# Altium PCB BAD.PcbDoc (part 2 of 2)
Units mil, origin at the board's own origin, x right, y up, seen from the top; angles counter-clockwise.
Board outline 1811.02 x 1811.02 mil, 4 copper layers (Top Layer, Int1 (GND), Int2, Bottom Layer), stack 53.912 mil thick; 65 components, 61 nets, 262 pads, 174 vias.
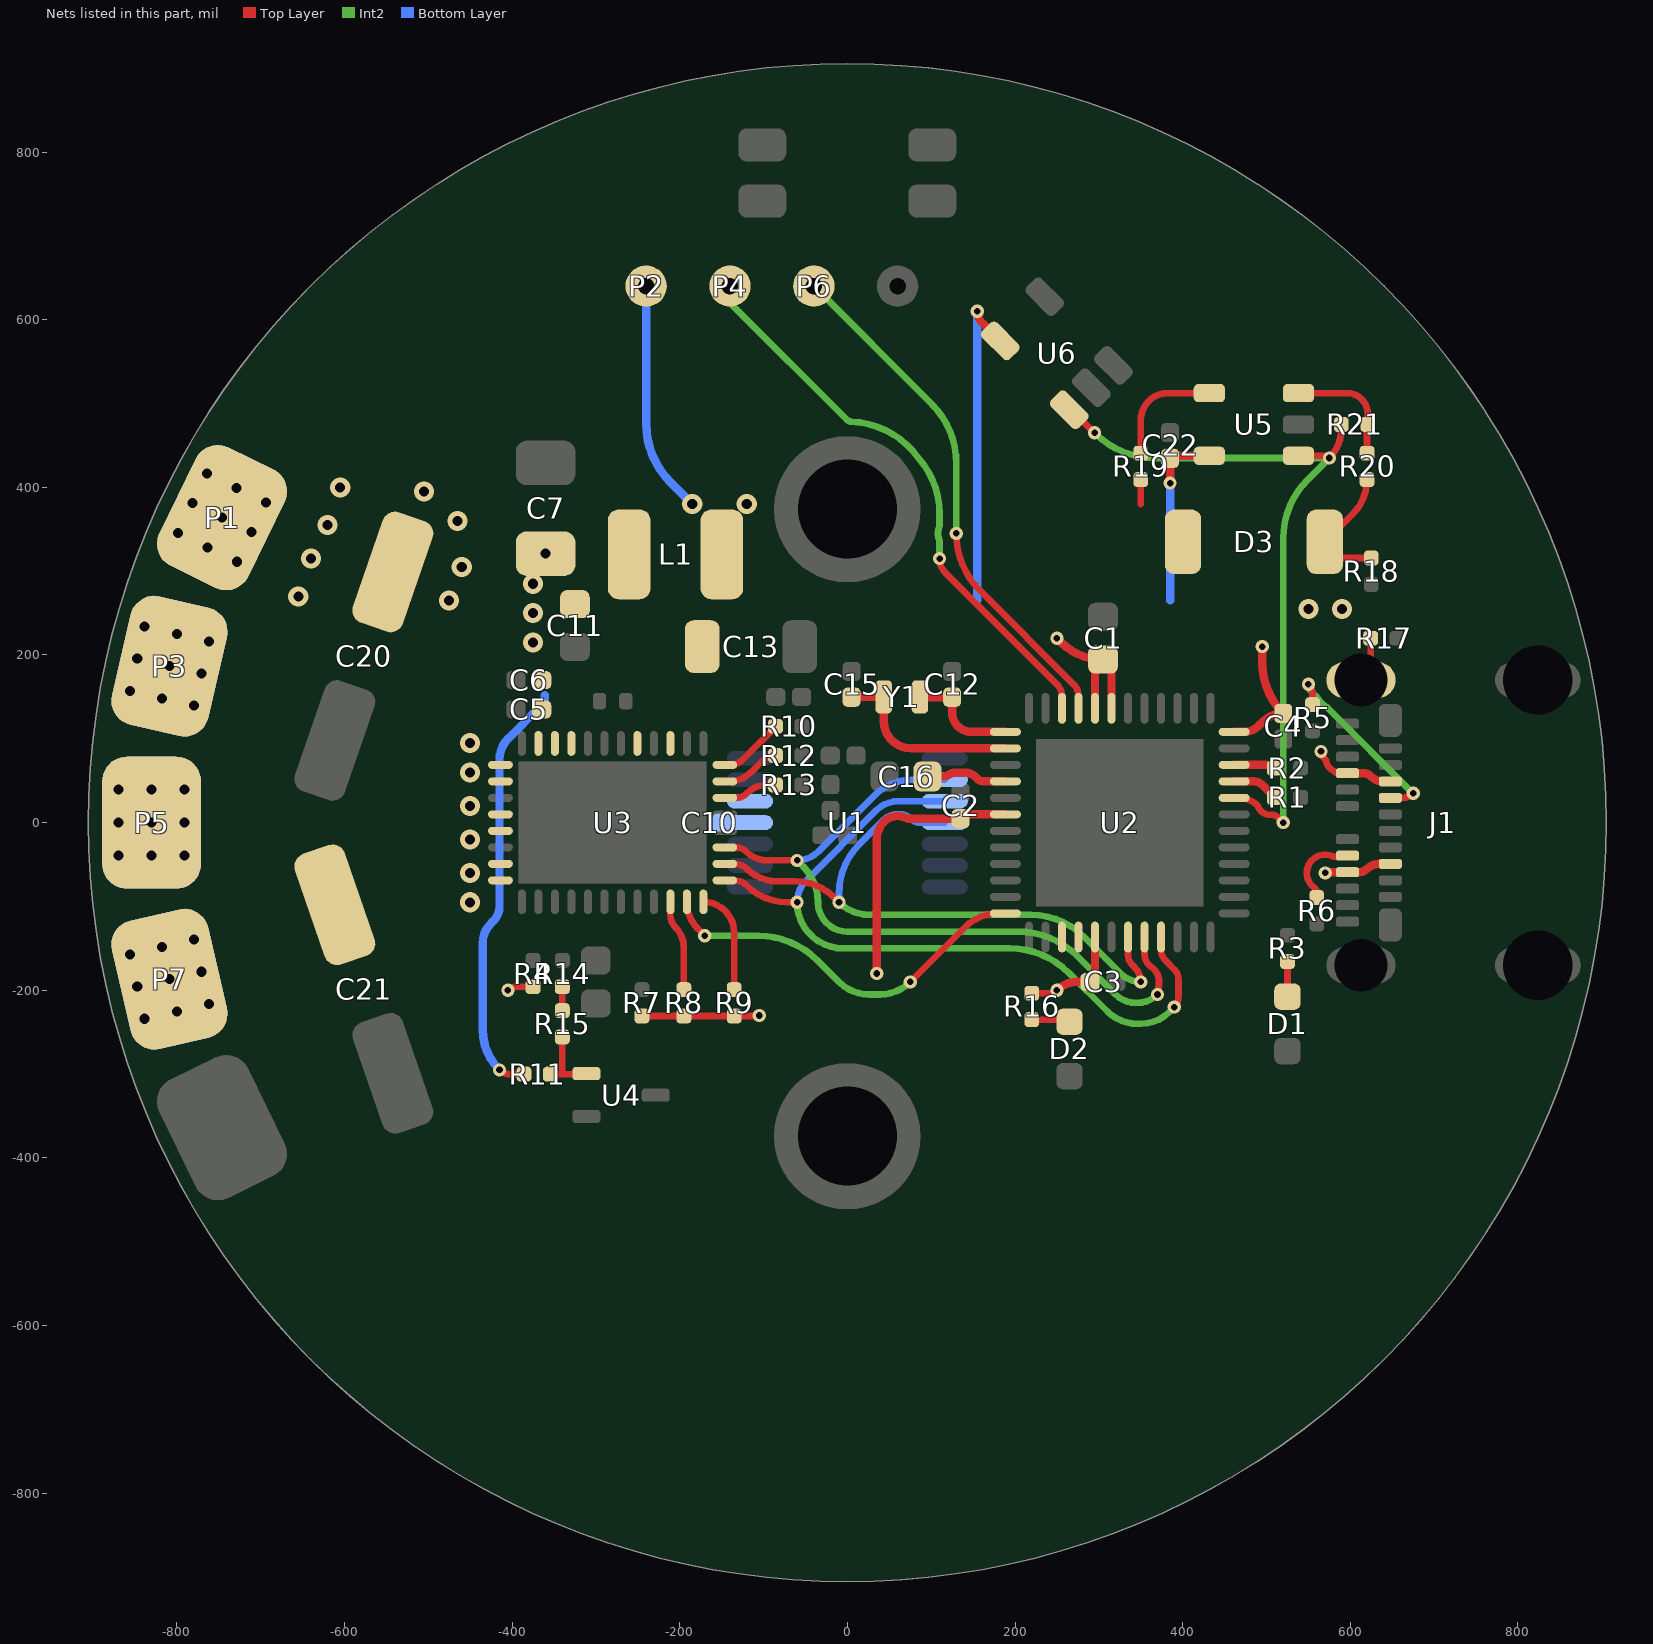
[diagram p4: the nets of this part, all layers, seen from the top]

## Via types
v1: diameter 15.75, hole 7.87, Top Layer to Bottom Layer, tented both sides, 77 vias
v2: diameter 12, hole 12, Top Layer to Bottom Layer, 45 vias
v3: diameter 24, hole 12, Top Layer to Bottom Layer, tented both sides, 36 vias
v4: diameter 7.87, hole 7.87, Top Layer to Bottom Layer, tented both sides, 16 vias

## Nets (pads, with @x,y where several pads share a name; then routed paths per layer and width w, separated by ;. In a path a pad name is that pad's centre, name@x,y a point inside that pad or via, vN(x,y) a via of type N, cw(c..) or ccw(c..) an arc to the next point about the centre after c; other vN are vias at no path point) (continued)
IN_VL: R8.2 U3.30 | length 109.1
  Top Layer w8: U3.30@-211.1,-94.49 -211.1,-110.27 ccw(c-190.27,-110.27) -205,-125 cw(c-229.14,-149.14) -195,-149.14 R8.2@-195,-199.25
IN_WH: U2.12 U3.31 | length 463.9
  Top Layer w8: U3.31@-191.42,-94.49 ccw(c-145.32,-94.49) -177.92,-127.08 v1(-170,-135) ; v1(75,-190) 140,-125 cw(c180.4,-165.4) 180.4,-108.27 U2.12@188.56,-108.27
  Int2 w8: v1(-170,-135) -106.42,-135 cw(c-106.42,-235) -35.71,-164.29 -10,-190 ccw(c26.21,-153.79) 26.21,-205 38.79,-205 ccw(c38.79,-153.79) v1(75,-190)
IN_WL: R9.2 U3.32 | length 125.7
  Top Layer w8: U3.32@-171.73,-94.49 cw(c-171.73,-131.22) -135,-131.22 R9.2@-135,-199.25
MISO: U1.3 U2.21 U3.33 | length 939.8
  Top Layer w8: U3.33@-146.14,-68.9 -134.73,-68.9 cw(c-134.73,-89.73) -120,-75 ccw(c-71.72,-26.72) -71.72,-95 v1(-60,-95) ; U2.21@374.21,-136.44 374.21,-151.03 ccw(c393.97,-151.03) 380,-165 390,-175 cw(c377.93,-187.07) 395,-187.07 395,-207.93 cw(c377.93,-207.93) v1(390,-220)
  Int2 w8: v1@-60,-99.64 v1(-60,-95) ccw(c-5,-95) -5,-150 193.58,-150 cw(c193.58,-250) 264.29,-179.29 310,-225 ccw(c346.21,-188.79) 346.21,-240 350,-240 ccw(c350,-191.72) 384.14,-225.86 v1(390,-220)
  Bottom Layer w8: v1(-60,-95) cw(c-23.79,-95) -49.4,-69.4 35,15 cw(c60.57,-10.57) 60.57,25.59 U1.3@116.14,25.59
MOSI: U1.4 U2.19 U3.34 | length 793.1
  Top Layer w8: U3.34@-146.14,-49.21 -133.97,-49.21 cw(c-133.97,-68.97) -120,-55 ccw(c-83.79,-18.79) -83.79,-70 -61.89,-70 cw(c-61.89,-134.91) -15.99,-89.01 v1(-10,-95) ; U2.19@334.84,-136.44 334.84,-157.55 ccw(c352.45,-157.55) 339.99,-169.99 342.93,-172.93 cw(c325.86,-190) v1(350,-190)
  Int2 w8: v1(-10,-95) ccw(c26.21,-58.79) 26.21,-110 218.73,-110 cw(c218.79,-200.14) 282.58,-136.46 326.09,-179.97 ccw(c350.17,-156.1) v1(350,-190)
  Bottom Layer w8: v1(-10,-95) -10,-84.79 cw(c73.99,-84.79) 14.6,-25.4 42.93,2.93 cw(c60,-14.14) 60,10 62.93,10 cw(c62.93,-7.07) 75,5 ccw(c87.07,17.07) 87.07,0 U1.4@116.14,0
NetC12_2: C12.2 U2.1 Y1.2 | length 133.6
  Top Layer w10: Y1.2@86.65,150 86.65,149.65 C12.2@125,149.65 125,131.59 ccw(c148.32,131.59) 148.32,108.27 U2.1@188.56,108.27
NetC15_2: C15.2 U2.2 Y1.1 | length 230.8
  Top Layer w10: C15.2@5,150 Y1.1@43.35,150 43.35,121.56 ccw(c76.33,121.56) 76.33,88.58 U2.2@188.56,88.58
NetC16_2: C16.2 U2.4 | length 97
  Top Layer w10: C16.2@95.59,55 114.23,55 ccw(c114.18,65) 119.66,56.63 cw(c129.69,41.46) 129.69,59.65 140.32,59.65 cw(c140.32,41.46) 154.37,53 ccw(c162.05,59.4) 160,49.62 ccw(c163.97,68.97) 163.97,49.21 U2.4@188.56,49.21
NetD1_2: D1.2 R3.2 | length 41.8
  Top Layer w8: D1.2@525,-207.52 R3.2@525,-165.75
NetD2_2: D2.2 R16.1 | length 45.7
  Top Layer w8: R16.1@220,-235 258.92,-235 cw(c258.92,-243.6) D2.2@265,-237.52
NetJ1_2: J1.2 R17.2 | length 53
  Top Layer w8: J1.2@612.72,170.08 ccw(c584.87,197.93) 624.25,197.93 R17.2@624.25,220
NetJ1_A5: J1.A5 R6.1 | length 96.9
  Top Layer w8: R6.1@560,-89.25 560,-83.8 ccw(c552,-83.84) 556.84,-77.47 cw(c570,-60) 578.85,-40 ccw(c582.04,-32.66) 583.4,-40.54 cw(c596.57,-114.08) 585.01,-40.27 ccw(c583.71,-32.38) 586.8,-39.76 586.8,-37.46 J1.A5@596.57,-39.37
NetJ1_B5: J1.B5 R5.1 | length 235.9
  Top Layer w8: v1(550,165) cw(c537.93,152.93) 555,152.93 R5.1@555,140.75 ; J1.B5@647.76,29.53 661.79,29.53 ccw(c661.79,48.21) 665.57,29.91 ccw(c663.92,37.74) 666.85,30.3 cw(c675,10) 668.87,31 ccw(c666.58,38.66) 670.12,31.49 ccw(c661.79,48.21) v1(675,35)
  Int2 w8: v1(550,165) 550,163.31 ccw(c558,163.31) 552.34,157.66 559.37,150.63 cw(c553.73,144.96) 560.46,149.28 ccw(c593.03,170.08) 572.17,137.55 cw(c567.91,130.77) 573.55,136.45 v1(675,35)
NetR10_1: R10.1 U3.40 | length 79
  Top Layer w8: U3.40@-146.14,68.9 -139.73,68.9 ccw(c-139.73,89.73) -125,75 R10.1@-86.28,113.72
  Top Layer w10: R10.1@-86.28,113.72 ccw(c-87.55,115) R10.1@-85.75,115
NetR11_1: R11.1 R15.2 U4.1 | length 87.3
  Top Layer w8: R11.1@-354.25,-300 -340,-300 ; R15.2@-340,-255.75 -340,-300 ; U4.1@-311.34,-299.41 cw(c-312.76,-297.99) -312.76,-300 -340,-300
NetR12_1: R12.1 U3.39 | length 70.6
  Top Layer w8: U3.39@-146.14,49.21 -141.04,49.21 ccw(c-141.04,86.04) -115,60 -101.54,73.46 cw(c-85.75,57.66) R12.1@-85.75,80
NetR13_1: R13.1 U3.38 | length 64.5
  Top Layer w8: U3.38@-146.14,29.53 -133.21,29.53 ccw(c-133.21,48.21) -120,35 cw(c-95.86,10.86) -95.86,45 R13.1@-85.75,45
NetR14_2: R14.2 R15.1 | length 28.5
  Top Layer w8: R15.1@-340,-224.25 R14.2@-340,-195.75
NetR19_1: R19.1 U5.4 | length 139.6
  Top Layer w8: R19.1@350,440.75 350,480 cw(c382.4,480) 382.4,512.4 U5.4@431.85,512.4
NetR20_1: R20.1 R21.1 U5.3 | length 143.9
  Top Layer w8: U5.3@538.15,512.4 596.18,512.4 cw(c596.18,487.84) 620.75,487.84 R21.1@620.75,475 ccw(c622.55,473.19) 620,473.19 R20.1@620,440.75
PHASE_U: P3.1 U3.13 U3.14
  other v2: -779.22,139.49 -817.58,148.35 -855.94,157.2 -770.37,177.85 -808.73,186.71 -847.09,195.57 -761.51,216.21 -799.87,225.07 -838.23,233.93
  other v3: -450,60 -450,95
PHASE_V: P5.1 U3.16 U3.17
  other v2: -869.37,-39.37 -830,-39.37 -790.63,-39.37 -869.37,0 -830,0 -790.63,0 -869.37,39.37 -830,39.37 -790.63,39.37
  other v3: -450,-20 -450,20
PHASE_W: P7.1 U3.19 U3.20
  other v2: -838.23,-233.93 -799.87,-225.07 -761.51,-216.21 -847.09,-195.57 -808.73,-186.71 -770.37,-177.85 -855.94,-157.2 -817.58,-148.35 -779.22,-139.49
  other v3: -450,-95 -450,-60
RX: U2.16
SCK: U1.2 U2.20 U3.35 | length 891.6
  Top Layer w8: U3.35@-146.14,-29.53 -133.21,-29.53 cw(c-133.21,-48.21) -120,-35 ccw(c-95.86,-10.86) -95.86,-45 v1(-60,-45) ; U2.20@354.53,-136.44 354.53,-156.79 ccw(c373.21,-156.79) 360,-170 360.62,-170.62 ccw(c366.24,-164.92) 361.85,-171.61 cw(c350,-190) 368.2,-177.87 cw(c362.28,-183.25) 369.77,-180.43 370.47,-182.29 cw(c350,-190) 371.87,-190 371.87,-191.39 cw(c363.87,-191.35) 371.73,-192.85 371.36,-194.8 ccw(c379.22,-196.29) 371.22,-196.29 371.22,-200.79 cw(c363.22,-200.75) v1(370,-205)
  Int2 w8: v1(-60,-45) -52.68,-52.32 cw(c-95.36,-95) -35,-95 ccw(c0,-95) 0,-130 203.58,-130 cw(c203.58,-230) 274.29,-159.29 320,-205 ccw(c344.14,-180.86) 344.14,-215 345.86,-215 ccw(c345.86,-180.86) v1(370,-205)
  Bottom Layer w8: v1(-60,-45) ccw(c-60,-8.79) -34.42,-34.42 33.54,33.54 cw(c76.14,-9.07) 76.14,51.18 U1.2@116.14,51.18
SW_BK: L1.2 U3.5
SWCLK: P6.1 U2.45 | length 625.1
  Top Layer w8: v1(130,345) ccw(c226.57,345) 158.28,276.72 270,165 cw(c256.03,151.03) 275.79,151.03 U2.45@275.79,136.44
  Int2 w8: P6.1@-40,640 100.71,499.29 cw(c30,428.58) 130,428.58 v1(130,345)
SWDIO: P4.1 U2.46 | length 680.7
  Top Layer w8: v1(110,315) ccw(c134.14,315) 117.07,297.93 250,165 cw(c235.27,150.27) 256.1,150.27 U2.46@256.1,136.44
  Int2 w8: P4.1@-140,640 -140,623.31 ccw(c-132,623.31) -137.66,617.66 -0.71,480.71 ccw(c4.91,486.4) 4.52,478.41 cw(c0,374.02) 85.26,434.42 cw(c10,368.58) 110,368.58 110,355.37 cw(c102,355.41) 109.51,352.66 ccw(c130,345) 109.51,337.35 cw(c102,334.59) 110,334.63 v1(110,315)
TX: U2.15
USB_IN: R21.2 U2.32 U5.1 U6.1 | length 933.8
  Top Layer w8: U6.1@264.62,492.49 cw(c264.62,485.5) 269.55,490.45 v1(295,465) ; U2.32@461.44,29.53 467,29.53 cw(c467,-3) 487.53,22.23 cw(c482.47,16.03) 489.82,19.19 ccw(c504.82,25.57) 504.82,9.27 507.42,9.27 cw(c507.42,1.27) 513.07,6.93 v1(520,0) ; U5.1@538.15,437.6 568.73,437.6 cw(c568.73,428.73) v1(575,435) ccw(c540.59,469.41) 589.25,469.41 R21.2@589.25,475
  Int2 w8: v1(295,465) 295.71,464.29 ccw(c366.42,535) 366.42,435 v1(575,435) 549.29,409.29 ccw(c620,338.58) 520,338.58 v1(520,0)
USB_N: R1.1 U2.33 | length 55.5
  Top Layer w10: U2.33@461.44,49.21 484.83,49.21 cw(c484.83,34.83) 495,45 R1.1@508.72,31.28 ; R1.1@508.73,31.27 cw(c507.45,30) R1.1@509.25,30
USB_P: R2.1 U2.34 | length 48.9
  Top Layer w10: U2.34@461.44,68.9 499.84,68.9 cw(c499.84,55.59) R2.1@509.25,65
VDD: C1.2 C2.2 C3.2 C4.2 C10.2 C13.1 C22.2 L1.1 P2.1 R4.1 R7.1 R8.1 R9.1 R16.2 U1.11 U1.12 U2.6 U2.17 U2.36 U2.43 U2.44 U3.3 U5.5 U6.5 | length 1858.1
  Top Layer w8: v1(-405,-200) cw(c-394.73,-210.27) -394.73,-195.75 R4.1@-375,-195.75 ; R7.1@-245,-230.75 R8.1@-195,-230.75 R9.1@-135,-230.75 -106.81,-230.75 ccw(c-106.81,-228.19) v1(-105,-230) ; R16.2@220,-203.5 241.54,-203.5 ccw(c241.54,-191.54) v1(250,-200)
  Top Layer w10: v1(35,-180) 35,-20 cw(c64.81,-20) 43.73,1.08 43.83,1.17 cw(c60,-15) 60,7.87 cw(c60,-15) 69.92,5.61 ccw(c74.21,14.65) 74.16,4.65 C2.2@135,4.65 cw(c140.2,4.65) 140.2,9.84 U2.6@188.56,9.84 ; v1(155,610) ccw(c174.06,610) 160.58,596.52 U6.5@182.49,574.62 ; v1(250,-200) cw(c274.14,-224.14) 274.14,-190 C3.2@289.65,-190 ccw(c275.58,-175.93) 295.47,-175.93 U2.17@295.47,-136.44 ; v1(250,220) 254.79,215.21 ccw(c305,265.41) C1.2@305,194.41 ; U2.44@295.47,136.44 295.47,184.88 C1.2@305,194.41 ; U2.43@315.16,136.44 315.16,184.25 C1.2@305,194.41 ; v1(385,405) C22.2@385,434.65 cw(c392.13,427.52) 392.13,437.6 U5.5@431.85,437.6 ; U2.36@461.44,108.27 473.75,108.27 ccw(c473.75,131.25) 490,115 495,120 cw(c520,95) C4.2@520,130.35 cw(c580.36,190.71) 495,190.71 v1(495,210)
  Bottom Layer w10: P2.1@-240,640 -240,476.42 ccw(c-140,476.42) -210.71,405.71 v3(-185,380) ; 155,265 v1(155,610) ; 385,265 v1(385,405)
  other v3: -120,380
VS: C5.2 C6.2 C7.2 C11.2 C20.1 C21.1 D3.1 P1.1 R11.2 R19.2 U3.9 U3.10 U3.11 | length 538.1
  Top Layer w8: v1(-415,-295) ccw(c-402.93,-282.93) -402.93,-300 R11.2@-385.75,-300 ; 350,380 R19.2@350,409.25
  Bottom Layer w10: v1(-415,-295) cw(c-366.72,-246.72) -435,-246.72 -435,-144.14 cw(c-400.86,-144.14) -425,-120 -422.07,-117.07 ccw(c-439.14,-100) -415,-100 -415,75 cw(c-378.79,75) -404.42,100.58 -366.46,138.54 ccw(c-380.06,152.13) -360.83,152.13
  other v2: -727.87,311.2 -763.26,328.46 -798.64,345.72 -710.61,346.59 -746,363.85 -781.38,381.11 -693.35,381.97 -728.74,399.23 -764.13,416.49
  other v3: -375,215 -375,250 -475,265 -655,270 -375,285 -460,305 -640,315 -360,320.84 -620,355 -465,360 -505,395 -605,400
VUSB: D3.2 J1.A4 J1.A9 J1.B4 J1.B9 R18.2 R20.2 | length 532.4
  Top Layer w8: v1(565,85) 565,83.98 ccw(c573,83.98) 567.34,78.32 569.13,76.53 cw(c563.45,70.9) 571.26,72.64 ccw(c585.75,75.79) 577.57,63.42 cw(c573.2,56.72) 577.82,63.25 581.68,60.52 ccw(c586.3,67.05) 586.26,59.05 J1.A9@596.57,59.06 ; R20.2@620,409.25 cw(c562.31,409.25) 603.1,368.46 D3.2@569.65,335 569.65,315.75 R18.2@625,315.75
  Top Layer w10: v1(570,-60) cw(c572.28,-62.28) 572.28,-59.06 610.21,-59.06 ccw(c610.21,-45.21) 620,-55 cw(c633.97,-68.97) 633.97,-49.21 J1.B9@647.76,-49.21 ; J1.A9@596.57,59.06 615.21,59.05 ; J1.B4@647.76,49.21 J1.B4@638.97,49.21 ; 615.21,59.05 cw(c615.21,45.21) 625,55 ; 615.21,59.05 cw(c615.21,45.21) 625,55 ; 615.21,59.05 cw(c615.21,45.21) 625,55 ; 615.21,59.05 cw(c615.21,45.21) 625,55 ; 615.21,59.05 cw(c615.21,45.21) 625,55 ; 615.21,59.05 cw(c615.21,45.21) 625,55 ; 615.21,59.05 cw(c615.21,45.21) 625,55 ; 615.21,59.05 cw(c615.21,45.21) 625,55 ; 625,55 ccw(c638.97,68.97) J1.B4@638.97,49.21 ; 625,55 ccw(c638.97,68.97) J1.B4@638.97,49.21 ; 625,55 ccw(c638.97,68.97) J1.B4@638.97,49.21 ; 625,55 ccw(c638.97,68.97) J1.B4@638.97,49.21 ; 625,55 ccw(c638.97,68.97) J1.B4@638.97,49.21 ; 625,55 ccw(c638.97,68.97) J1.B4@638.97,49.21 ; 625,55 ccw(c638.97,68.97) J1.B4@638.97,49.21 ; 625,55 ccw(c638.97,68.97) J1.B4@638.97,49.21
  other v3: 550,255 590,255
pads on no net: J1.1 J1.3 J1.4 J1.A2 J1.A3 J1.A8 J1.A10 J1.A11 J1.B2 J1.B3 J1.B8 J1.B10 J1.B11 SW1.1 SW1.2 U1.6 U1.7 U1.8 U1.9 U1.10 U1.14 U2.11 U2.13 U2.14 U2.22 U2.23 U2.30 U2.39 U2.41 U2.48 U3.1 U3.24 U4.3
copper on no net: | length 5387.8
  Top Layer w10: 43.35,121.56 ccw(c76.33,121.56) 76.33,88.58 ; 43.35,121.56 ccw(c76.33,121.56) 76.33,88.58 ; 43.35,121.56 ccw(c76.33,121.56) 76.33,88.58 ; 43.35,121.56 ccw(c76.33,121.56) 76.33,88.58 ; 43.35,121.56 ccw(c76.33,121.56) 76.33,88.58 ; 43.35,121.56 ccw(c76.33,121.56) 76.33,88.58 ; 43.35,121.56 ccw(c76.33,121.56) 76.33,88.58 ; 43.35,121.56 ccw(c76.33,121.56) 76.33,88.58 ; 43.35,121.56 ccw(c76.33,121.56) 76.33,88.58 ; 43.35,121.56 ccw(c76.33,121.56) 76.33,88.58 ; 43.35,121.56 ccw(c76.33,121.56) 76.33,88.58 ; 43.35,121.56 ccw(c76.33,121.56) 76.33,88.58 ; 43.35,121.56 ccw(c76.33,121.56) 76.33,88.58 ; 43.35,121.56 ccw(c76.33,121.56) 76.33,88.58 ; 43.35,121.56 ccw(c76.33,121.56) 76.33,88.58 ; 43.35,121.56 ccw(c76.33,121.56) 76.33,88.58 ; 43.35,121.56 ccw(c76.33,121.56) 76.33,88.58 ; 43.35,121.56 ccw(c76.33,121.56) 76.33,88.58 ; 43.35,121.56 ccw(c76.33,121.56) 76.33,88.58 ; 43.35,121.56 ccw(c76.33,121.56) 76.33,88.58 ; 43.35,121.56 ccw(c76.33,121.56) 76.33,88.58 ; 43.35,121.56 ccw(c76.33,121.56) 76.33,88.58 ; 43.35,121.56 ccw(c76.33,121.56) 76.33,88.58 ; 43.35,121.56 ccw(c76.33,121.56) 76.33,88.58 ; 43.35,121.56 ccw(c76.33,121.56) 76.33,88.58 ; 43.35,121.56 ccw(c76.33,121.56) 76.33,88.58 ; 43.35,121.56 ccw(c76.33,121.56) 76.33,88.58 ; 43.35,121.56 ccw(c76.33,121.56) 76.33,88.58 ; 43.35,121.56 ccw(c76.33,121.56) 76.33,88.58 ; 43.35,121.56 ccw(c76.33,121.56) 76.33,88.58 ; 43.35,121.56 ccw(c76.33,121.56) 76.33,88.58 ; 43.35,121.56 ccw(c76.33,121.56) 76.33,88.58 ; 43.35,121.56 ccw(c76.33,121.56) 76.33,88.58 ; 43.35,121.56 ccw(c76.33,121.56) 76.33,88.58 ; 43.35,121.56 ccw(c76.33,121.56) 76.33,88.58 ; 43.35,121.56 ccw(c76.33,121.56) 76.33,88.58 ; 43.35,121.56 ccw(c76.33,121.56) 76.33,88.58 ; 43.35,121.56 ccw(c76.33,121.56) 76.33,88.58 ; 43.35,121.56 ccw(c76.33,121.56) 76.33,88.58 ; 43.35,121.56 ccw(c76.33,121.56) 76.33,88.58 ; 43.35,121.56 ccw(c76.33,121.56) 76.33,88.58 ; 43.35,121.56 ccw(c76.33,121.56) 76.33,88.58 ; 43.35,121.56 ccw(c76.33,121.56) 76.33,88.58 ; 43.35,121.56 ccw(c76.33,121.56) 76.33,88.58 ; 43.35,121.56 ccw(c76.33,121.56) 76.33,88.58 ; 43.35,121.56 ccw(c76.33,121.56) 76.33,88.58 ; 43.35,121.56 ccw(c76.33,121.56) 76.33,88.58 ; 43.35,121.56 ccw(c76.33,121.56) 76.33,88.58 ; 43.35,121.56 ccw(c76.33,121.56) 76.33,88.58 ; 43.35,121.56 ccw(c76.33,121.56) 76.33,88.58 ; 43.35,121.56 ccw(c76.33,121.56) 76.33,88.58 ; 43.35,121.56 ccw(c76.33,121.56) 76.33,88.58 ; 43.35,121.56 ccw(c76.33,121.56) 76.33,88.58 ; 43.35,121.56 ccw(c76.33,121.56) 76.33,88.58 ; 43.35,121.56 ccw(c76.33,121.56) 76.33,88.58 ; 43.35,121.56 ccw(c76.33,121.56) 76.33,88.58 ; 43.35,121.56 ccw(c76.33,121.56) 76.33,88.58 ; 43.35,121.56 ccw(c76.33,121.56) 76.33,88.58 ; 43.35,121.56 ccw(c76.33,121.56) 76.33,88.58 ; 43.35,121.56 ccw(c76.33,121.56) 76.33,88.58 ; 43.35,121.56 ccw(c76.33,121.56) 76.33,88.58 ; 43.35,121.56 ccw(c76.33,121.56) 76.33,88.58 ; 43.35,121.56 ccw(c76.33,121.56) 76.33,88.58 ; 43.35,121.56 ccw(c76.33,121.56) 76.33,88.58 ; 43.35,121.56 ccw(c76.33,121.56) 76.33,88.58 ; 43.35,121.56 ccw(c76.33,121.56) 76.33,88.58 ; 43.35,121.56 ccw(c76.33,121.56) 76.33,88.58 ; 43.35,121.56 ccw(c76.33,121.56) 76.33,88.58 ; 43.35,121.56 ccw(c76.33,121.56) 76.33,88.58 ; 43.35,121.56 ccw(c76.33,121.56) 76.33,88.58 ; 43.35,121.56 ccw(c76.33,121.56) 76.33,88.58 ; 43.35,121.56 ccw(c76.33,121.56) 76.33,88.58 ; 43.35,121.56 ccw(c76.33,121.56) 76.33,88.58 ; 43.35,121.56 ccw(c76.33,121.56) 76.33,88.58 ; 43.35,121.56 ccw(c76.33,121.56) 76.33,88.58 ; 43.35,121.56 ccw(c76.33,121.56) 76.33,88.58 ; 43.35,121.56 ccw(c76.33,121.56) 76.33,88.58 ; 43.35,121.56 ccw(c76.33,121.56) 76.33,88.58 ; 43.35,121.56 ccw(c76.33,121.56) 76.33,88.58 ; 43.35,121.56 ccw(c76.33,121.56) 76.33,88.58 ; 43.35,121.56 ccw(c76.33,121.56) 76.33,88.58 ; 43.35,121.56 ccw(c76.33,121.56) 76.33,88.58 ; 43.35,121.56 ccw(c76.33,121.56) 76.33,88.58 ; 43.35,121.56 ccw(c76.33,121.56) 76.33,88.58 ; 43.35,121.56 ccw(c76.33,121.56) 76.33,88.58 ; 43.35,121.56 ccw(c76.33,121.56) 76.33,88.58 ; 43.35,121.56 ccw(c76.33,121.56) 76.33,88.58 ; 43.35,121.56 ccw(c76.33,121.56) 76.33,88.58 ; 43.35,121.56 ccw(c76.33,121.56) 76.33,88.58 ; 43.35,121.56 ccw(c76.33,121.56) 76.33,88.58 ; 43.35,121.56 ccw(c76.33,121.56) 76.33,88.58 ; 43.35,121.56 ccw(c76.33,121.56) 76.33,88.58 ; 43.35,121.56 ccw(c76.33,121.56) 76.33,88.58 ; 43.35,121.56 ccw(c76.33,121.56) 76.33,88.58 ; 43.35,121.56 ccw(c76.33,121.56) 76.33,88.58 ; 43.35,121.56 ccw(c76.33,121.56) 76.33,88.58 ; 43.35,121.56 ccw(c76.33,121.56) 76.33,88.58 ; 43.35,121.56 ccw(c76.33,121.56) 76.33,88.58 ; 43.35,121.56 ccw(c76.33,121.56) 76.33,88.58 ; 43.35,121.56 ccw(c76.33,121.56) 76.33,88.58 ; 43.35,121.56 ccw(c76.33,121.56) 76.33,88.58 ; 43.35,121.56 ccw(c76.33,121.56) 76.33,88.58 ; 43.35,121.56 ccw(c76.33,121.56) 76.33,88.58 ; 43.35,121.56 ccw(c76.33,121.56) 76.33,88.58

## Polygon pours and split planes (outlines as drawn)
VDD on Top Layer "VDD_L01_P025" (solid, pour order 25): -100,380 ccw(c-120,380) -120,400 -185,400 ccw(c-185,380) -205,380 -205,147.07 cw(c-222.07,147.07) -210,135 ccw(c-185.86,110.86) -220,110.86 -220,85 ccw(c-210,85) -210,75 ccw(c-210,85) -200,85 -200,105 cw(c-163.79,105) -189.39,130.61 -129.29,190.71 ccw(c-200,261.42) -100,261.42
GND on Top Layer "GND_L01_P036" (solid, pour order 36): -400.71,185.03 -607.87,185.03 ccw(c-607.87,167.87) -620,180 -660,65 -665,50 ccw(c-640.86,50) -657.93,32.93 -655,30 -600,15 cw(c-758.03,-130.56) -545.18,-159.82 cw(c-630.57,-159.86) -590,-235 -740,-265 -830,-305 -830,-335 -775,-450 -745,-460 -488.15,-372.39 ccw(c-526.42,-280) -455.71,-350.71 -444.02,-339.02 ccw(c-477.85,-305.18) -430,-305.18 -430,-215.36 ccw(c-515.34,-215.35) -455,-155 cw(c-394.64,-94.64) -480,-94.64 -480,100.3 cw(c-465.3,100.3) -465.3,115 -440,115 cw(c-440,95) -420,95 ccw(c-405,95) -405,80 -389.5,80 ccw(c-389.5,89.51) -380,89.51 -380,165 ccw(c-400,165) -400,185 cw(c-400,195.03)
GND on Top Layer "GND_L01_P035" (solid, pour order 35): -79.14,230.86 cw(c-45,196.72) -45,245 -35,245 cw(c-35,225) -15,225 -15,215 ccw(c0,215) 0,200 130,200 cw(c130,190) 140,190 140,175 cw(c135,175) 135,170 -60,170 ccw(c-60,160) -70,160 -70,145 cw(c-80,145) -80,135 -100.86,135 ccw(c-100.86,100.86) -125,125 cw(c-149.14,149.14) -149.14,115 -170,115 ccw(c-170,105) -180,105 -180,92.58 cw(c-191.42,92.58) -191.42,81.16 cw(c-191.42,89.74) -200,89.74 -200,95 cw(c-163.79,95) -189.39,120.61
VS on Top Layer "Top Layer-VS" (solid, pour order 29): -390.38,189.08 -397.01,195.71 ccw(c-467.72,125) -467.72,225 -555,225 -615,205 -630,190 -675,55 -675,25 -649.14,-0.86 ccw(c-615,33.28) -615,-15 -612.07,-15 cw(c-612.07,-32.07) -600,-20 -560,-140 -560,-160 -615,-180 -646.72,-180 cw(c-646.72,-111.72) -695,-160 -711.72,-143.28 cw(c-643.43,-75) -740,-75 -745,90 -720,255 -830,300 -830,335 -775,450 -745,460 -675,430 -666.21,430 ccw(c-666.21,529.5) -595.86,459.14 -537.78,517.22 -509.29,545.71 cw(c-438.58,475) -438.58,575 -308.58,575 58.58,575 cw(c58.58,475) 129.29,545.71 265.71,409.29 ccw(c336.42,480) 336.42,380 345,380 cw(c347.49,362.67) 347.5,380.18 cw(c347.51,362.65) 350,380 415,380 cw(c415,365) 430,365 430,305 cw(c415,305) 415,290 350,290 cw(c347.5,307.48) 347.5,289.82 cw(c347.5,307.5) 345,290 296.42,290 cw(c296.42,390) 225.71,319.29 89.29,455.71 ccw(c18.58,385.01) 18.58,485 -233.58,485 ccw(c-233.58,419.14) -299.43,419.14 -299.43,336.74 cw(c-452.22,336.71) -300,323.58 -300,245 cw(c-310,245) -310,235 ccw(c-310,225) -320,225 -320,85 cw(c-330,85) -330,75 -370,75 cw(c-370,85) -380,85 -380,175.01 ccw(c-392.05,175.01) -383.54,183.54 -386.46,186.46 ccw(c-394.99,177.95)
SW_BK on Top Layer "SW_BK_L01_P023" (solid, pour order 23): -245,149.14 -245,150 ccw(c-260,150) -260,165 -275,165 cw(c-275,180) -290,180 -290,365 cw(c-275,365) -275,380 -245,380 cw(c-245,365) -230,365 -230,324.14 ccw(c-195.86,324.14) -220,300 cw(c-244.13,275.86) -210,275.86 -210,165 cw(c-258.28,165) -224.14,130.86 -235,120 ccw(c-222.93,107.93) -240,107.93 -240,85 cw(c-250,85) -250,75 cw(c-250,85) -260,85 -260,112.93 cw(c-242.93,112.93) -255,125 ccw(c-279.14,149.14)
PHASE_V on Top Layer "PHASE_V_L01_P006" (solid, pour order 6): -430,20 cw(c-430,25) -435,25 ccw(c-445,25) -445,35 -455,35 ccw(c-455,25) -465,25 -465,-25 ccw(c-455,-25) -455,-35 -445,-35 ccw(c-445,-25) -435,-25 cw(c-430,-25) -430,-20 -410,-20 ccw(c-410,-15) -405,-15 -405,15 ccw(c-410,15) -410,20
GND on Top Layer "GND_L01_P003" (solid, pour order 3): 665,105 cw(c660,105) 660,100 635,100 cw(c635,105) 630,105 ccw(c625,105) 625,110 585,110 cw(c585,115) 580,115 580,140 cw(c585,140) 585,145 660,145 cw(c660,140) 665,140
GND on Top Layer "GND_L01_P002" (solid, pour order 2): 665,-105 ccw(c660,-105) 660,-100 635,-100 ccw(c635,-105) 630,-105 cw(c625,-105) 625,-110 585,-110 ccw(c585,-115) 580,-115 580,-140 ccw(c585,-140) 585,-145 660,-145 ccw(c660,-140) 665,-140
VUSB on Top Layer "VUSB_L01_P022" (solid, pour order 22): 545,235 cw(c545,245) 535,245 535,370 cw(c545,370) 545,380 595,380 cw(c595,370) 605,370 605,245 cw(c595,245) 595,235
PHASE_U on Top Layer "PHASE_U_L01_P008" (solid, pour order 8): -415,40 -455,40 cw(c-455,50) -465,50 -465,100 cw(c-455,100) -455,110 -445,110 cw(c-445,100) -435,100 -435,90 ccw(c-425,90) -425,80 -415,80 cw(c-415,70) -405,70 -405,50 cw(c-415,50)
PHASE_W on Top Layer "PHASE_W_L01_P005" (solid, pour order 5): -415,-40 -455,-40 ccw(c-455,-50) -465,-50 -465,-100 ccw(c-455,-100) -455,-110 -445,-110 ccw(c-445,-100) -435,-100 -435,-90 cw(c-425,-90) -425,-80 -415,-80 ccw(c-415,-70) -405,-70 -405,-50 ccw(c-415,-50)
VDD on Bottom Layer "VDD_L04_P030" (solid, pour order 30): 510,210 cw(c495,210) 495,195 ccw(c495,175) 475,175 475,-255 cw(c455,-255) 455,-275 346.42,-275 cw(c346.42,-174.68) 345,-274.99 314.14,-275 cw(c314.14,-240.86) 290,-265 ccw(c253.79,-301.2) 253.79,-250 -405,-250 cw(c-405,-235) -420,-235 -420,-165 cw(c-405.01,-164.99) -405,-150 163.58,-150 ccw(c163.58,-50.02) 234.29,-120.71 255,-100 ccw(c230.89,-75.87) 265,-75.86 265,40 ccw(c216.75,40.01) 250.86,74.14 240,85 ccw(c203.8,48.81) 203.79,100 95,100 ccw(c94.99,75.87) 77.93,92.93 1.82,16.82 cw(c-53.03,71.48) -0.03,15.03 -0.71,14.29 cw(c-71.42,85) -71.42,-15 -155,-15 cw(c-155,-5) -165,-5 -165,30 cw(c-155,30) -155,40 -90,40 ccw(c-90,50) -80,50 -80,130 ccw(c-100,130) -100,150 -185,150 cw(c-185,170) -205,170 -205,380 cw(c-185,380) -185,400 -120,400 cw(c-120,380) -100,380 -100,365 ccw(c0,365) 0,265 490,265 cw(c490,245) 510,245
VUSB on Bottom Layer "VUSB_L04_P021" (solid, pour order 21): 520,205 cw(c500,205) 500,185 ccw(c500,170) 485,170 485,150 ccw(c500,150) 500,135 cw(c500,115) 520,115 520,-70 ccw(c530,-70) 530,-80 595,-80 ccw(c595,-70) 605,-70 605,260 ccw(c595,260) 595,270 530,270 ccw(c530.03,259.97) 520,260
VS on Bottom Layer "VS_L04_P037" (solid, pour order 37): -400,164.99 -400,165.86 ccw(c-434.14,165.86) -410,190 ccw(c-434.14,165.86) -434.14,200 -540,200 -765,280 -825,310 -830,335 -775,445 -750,460 -670,425 -390,425 cw(c-390,325) -290,325 -290,165 cw(c-315,165) -315,140 -375,140 cw(c-375,165)
PHASE_W on Bottom Layer "PHASE_W_L04_P019" (solid, pour order 19): -435,-95 cw(c-450,-95) -450,-110 -728.05,-250.69 -822.6,-283.24 -846.44,-275.03 -881.34,-123.86 -873.44,-107.24 -764.26,-93.84 -450,-45 cw(c-450,-60) -435,-60
PHASE_V on Bottom Layer "PHASE_V_L04_P018" (solid, pour order 18): -435,20 ccw(c-450,20) -450,35 -765.78,80.49 -865.23,90.94 -886.61,77.57 -886.61,-77.57 -865.23,-90.94 -765.78,-80.49 -450,-35 ccw(c-450,-20) -435,-20
PHASE_U on Bottom Layer "PHASE_U_L04_P017" (solid, pour order 17): -435,95 ccw(c-450,95) -450,110 -728.05,250.69 -822.6,283.24 -846.44,275.03 -881.34,123.86 -873.44,107.24 -764.26,93.84 -450,45 ccw(c-450,60) -435,60
GND on Int1 (GND) "GNDPOUR" (solid, pour order 0): -905.51,0 ccw(c0,0) 0,-905.51 ccw(c0,0) 905.51,0 ccw(c0,0) 0,905.51 ccw(c0,0)

## Silkscreen, mask and mechanical layers (free items; w line width, h text height)
Top Overlay:
  text "RESET" at 175,752 h30
  text "VDD" at -279.99,570 h30
  text "IO" at -162.49,570 h30
  text "CLK" at -79.99,570 h30
  text "GND" at 20.01,570 h30
  text "+" at -683.99,521.66 h60 r234
  text "FAULT" at 337.05,-255 h30
  text "VDD" at 147.03,-285 h30
  text "-" at -707.5,-489.31 h60 r306
  text "FOC Motor Controller / Featuring: / - DRV8316 / - SAMD21 /  / 3A Cont. 8A Burst / 5-40v" at -290.41,-868.56 h30
Bottom Overlay:
  region: 1653 vertices and 1 holes, not listed, extent -170.69,-793.62 188.35,-515.48
  text "VS" at -689.54,308.51 h30 r244
  text "U" at -737.89,160.1 h30 r257
  text "V" at -755,-10 h30 r270
  text "W" at -733.4,-179.58 h30 r283
  text "GND" at -661.06,-366.91 h30 r296
Board:
  circle w10: c0,0 r905.51
Mechanical 13:
  lines w10: 43.35,121.56 ccw(c76.33,121.56) 76.33,88.58